# Altium PCB PCB1.PcbDoc (part 1 of 2)
Units mil, origin at the board's own origin, x right, y up, seen from the top; angles counter-clockwise.
Board outline 3287.4 x 2559.05 mil, 2 copper layers (Top Layer, Bottom Layer); 88 components, 66 nets, 297 pads, 96 vias.
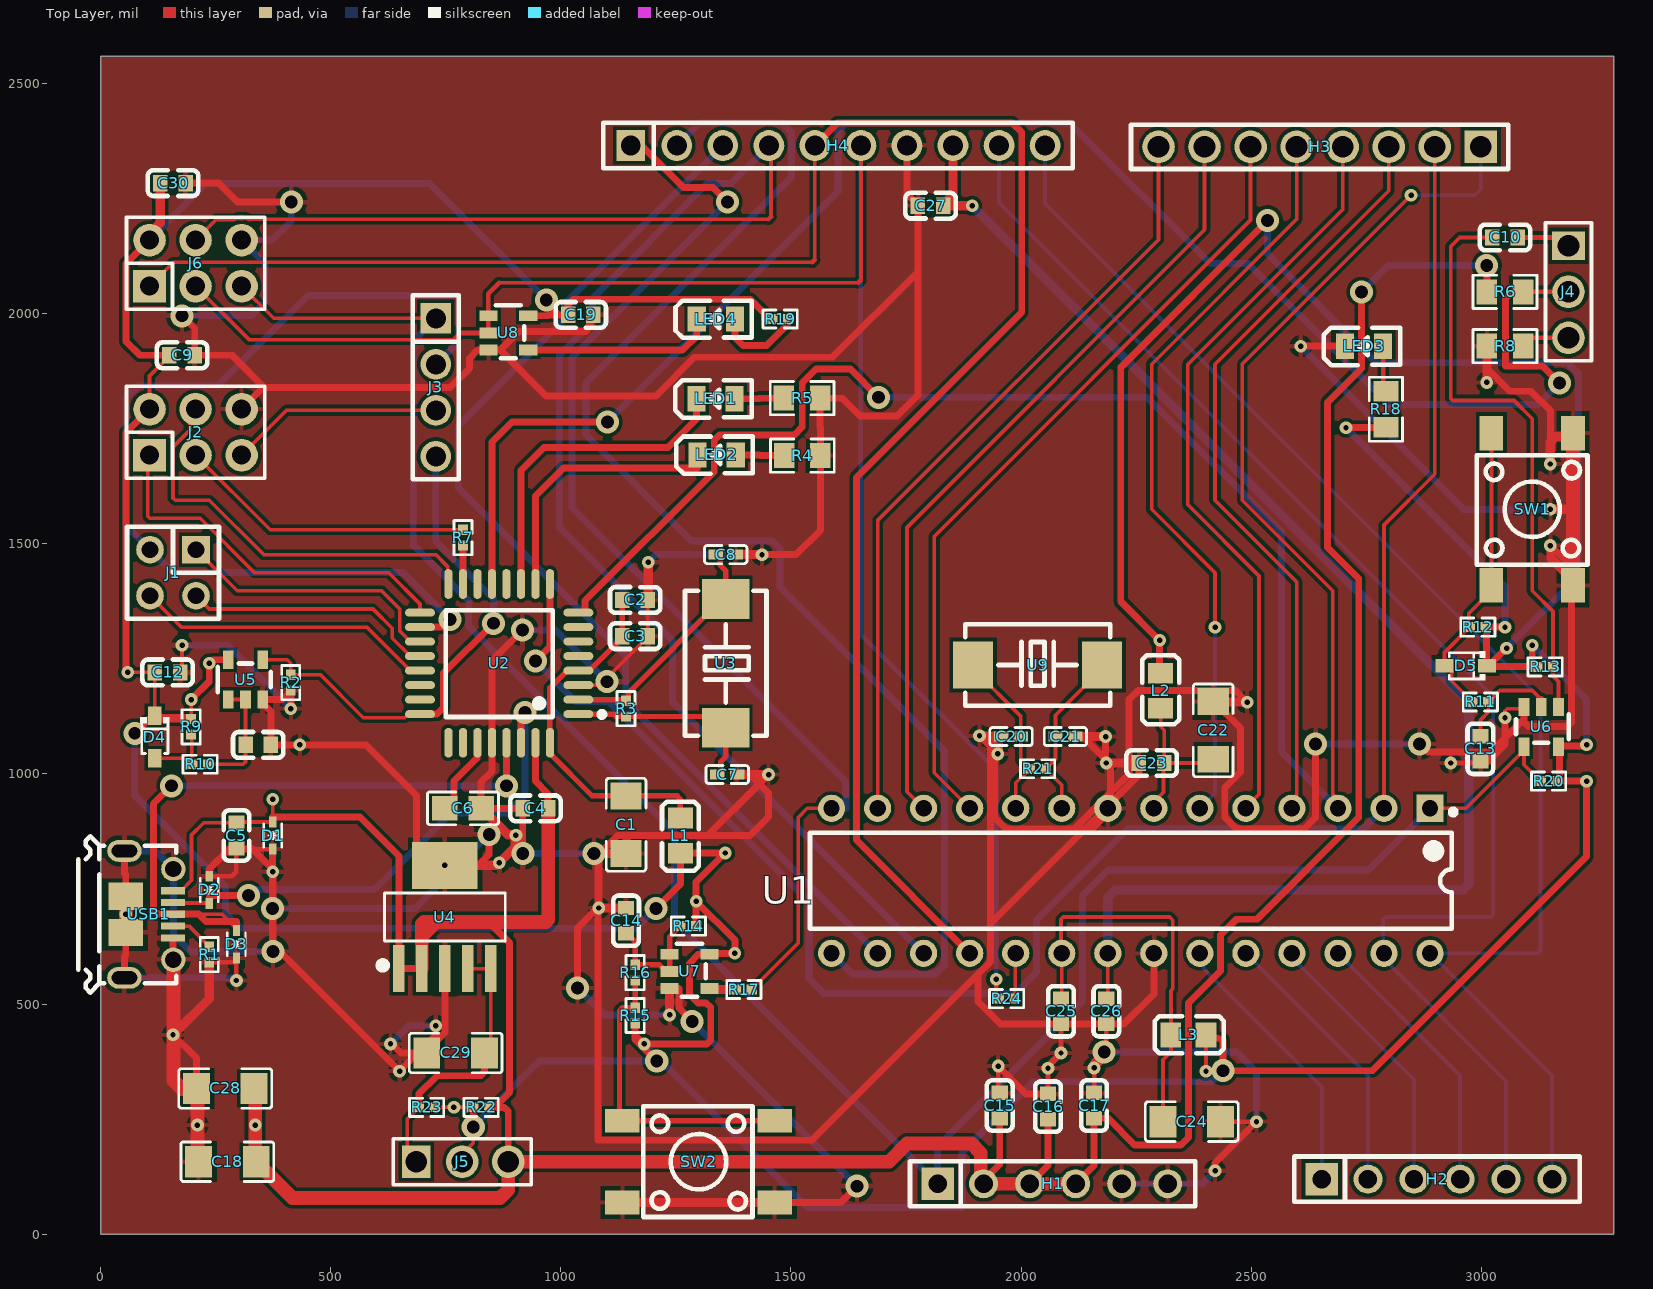
[diagram p0: Top Layer view]
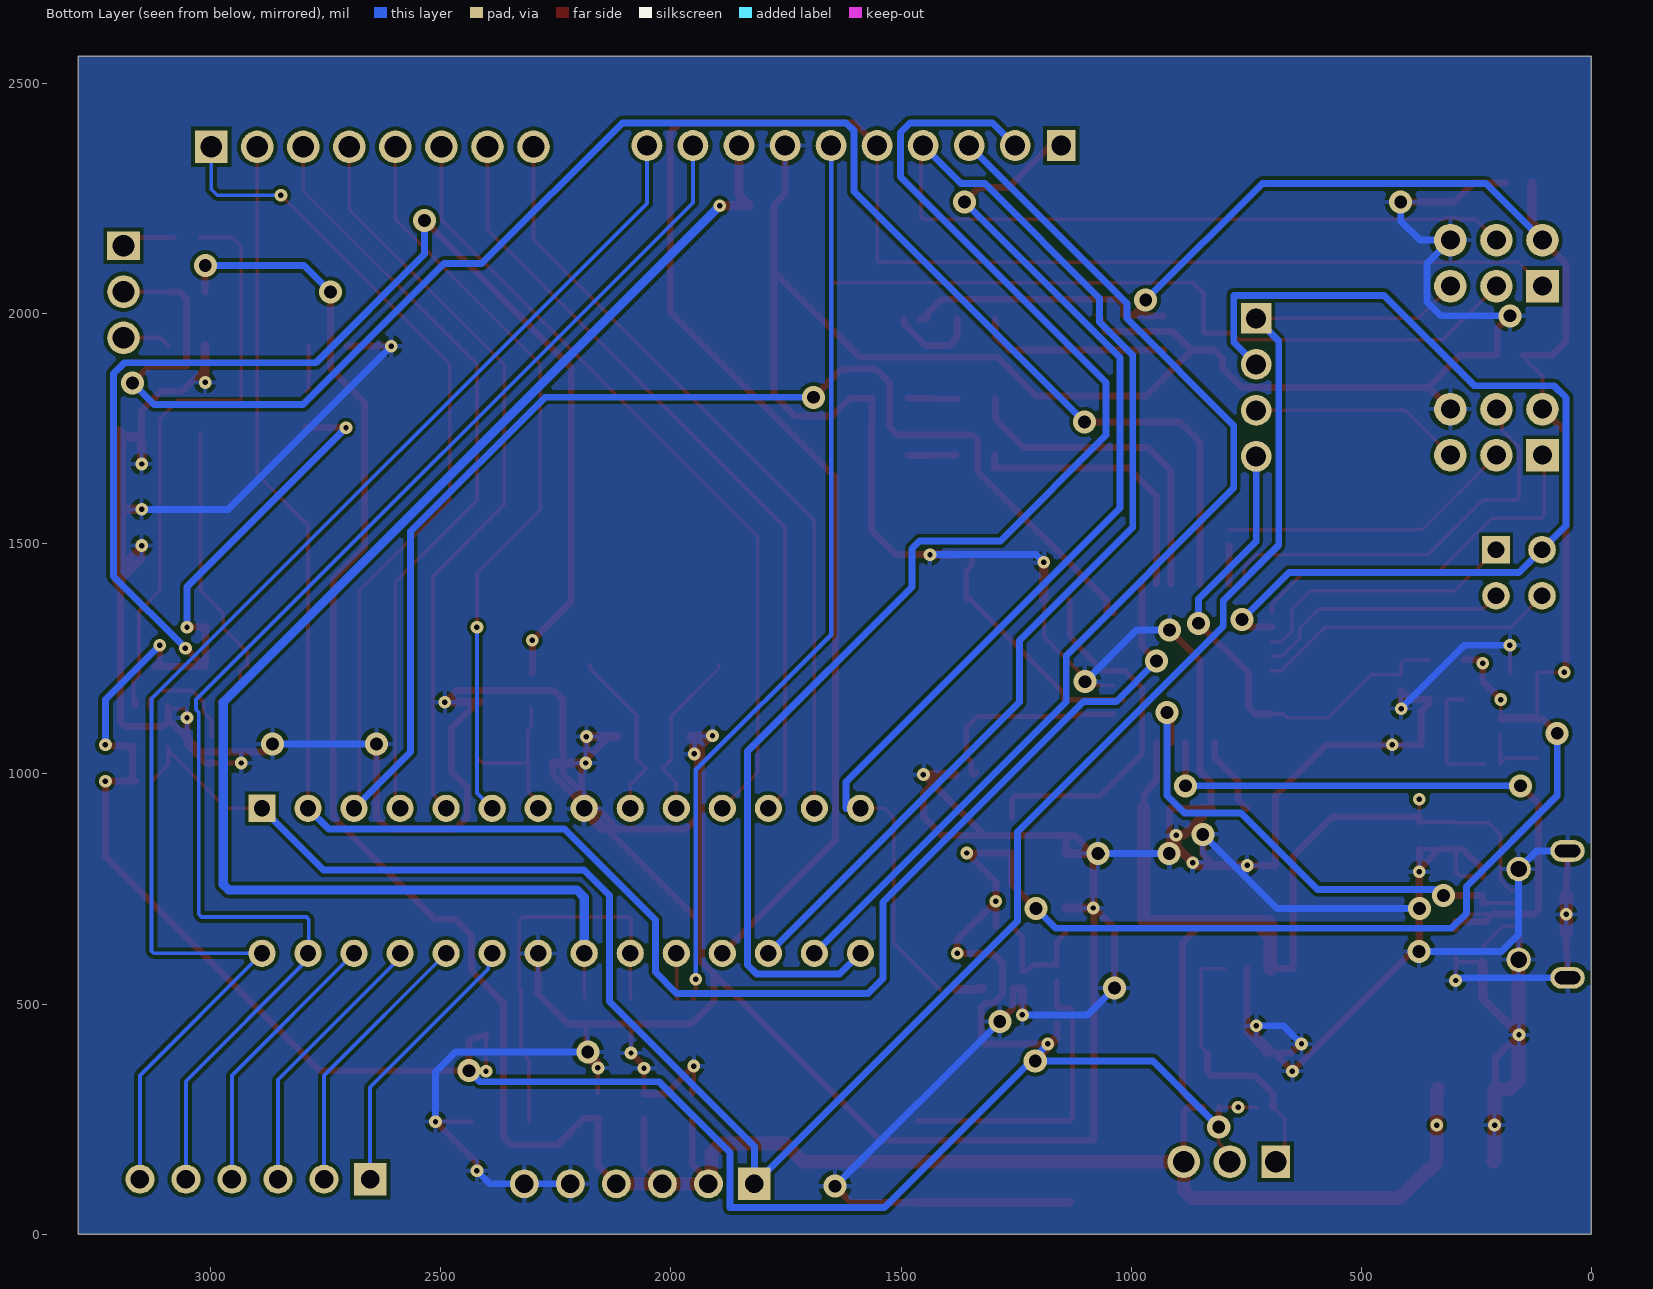
[diagram p1: Bottom Layer view, seen from below]

## Layer stack, top to bottom
Top Solder: solder mask 0.4, Solder Resist, Dk 3.5
Top Layer: signal copper 1.4
Dielectric 1: dielectric 12.6, FR-4, Dk 4.8
Bottom Layer: signal copper 1.4
Bottom Solder: solder mask 0.4, Solder Resist, Dk 3.5

## Board outline
0,0 0,2559.05 3287.4,2559.05 3287.4,0

## Design rules (kind name [scope] priority, off if disabled: settings)
Clearance [All] p1: gap=7.87 ignorepadtopadclearanceinfootprint=FALSE
PolygonConnect [All] p1: connectstyle=Relief reliefconductorwidth=10 reliefentries=4 polygonreliefangle="90 Angle" airgapwidth=10
RoutingVias [All] p1: holewidth=28 width=50 viastyle="Through Hole" minholewidth=10 minwidth=20 maxholewidth=35 maxwidth=60
SolderMaskExpansion [All] p1: expansion=4 istentingtop=FALSE
SupplyNets "Schematic Supply Nets_4" [InNet('GND')] p1: voltage=0.000
SupplyNets "Schematic Supply Nets_3" [InNet('+5V/3V3')] p2: voltage=0.000
SupplyNets "Schematic Supply Nets_2" [InNet('+5V')] p3: voltage=0.000
SupplyNets "Schematic Supply Nets_1" [InNet('+3V3')] p4: voltage=0.000
SupplyNets "Schematic Supply Nets" [InNet('+AREF')] p5: voltage=0.000
Width [All] p1: maxlimit=30 minlimit=8 preferedwidth=15
30 further rules are at their usual default settings.

## Components (designator, comment, footprint, x,y, rotation, side; value= is the part's Value field where it differs from the comment)
C1 "10uF" C1206-10uF 1141.73,889.47 r270 top
C2 "100nF" C0603-100nF 1161.42,1377.95 r180 top
C3 "100nF" C0603-100nF 1161.42,1299.21 r180 top
C4 "100nF" C0603-100nF 944.88,925.2 r180 top
C5 "100nF" C0603-100nF 295.28,866.14 r90 top
C6 "1uF" C0805-1uF 787.4,925.2 r180 top
C7 "18pF" C0402-18pF 1361.46,998.57 r180 top
C8 "18pF" C0402-18pF 1358.27,1476.38 r180 top
C9 "100nF" C0603-100nF 177.17,1909.45 r180 top
C10 "100nF" C0603-100nF 3051.18,2165.35 r0 top
C12 "100nF" C0603-100nF 145.67,1220.47 r180 top
C13 "100nF" C0603-100nF 2997.7,1054.55 r90 top
C14 "100nF" C0603-100nF 1141.73,681.1 r270 top
C15 "100nF" C0603-100nF 1953.43,279.57 r270 top
C16 "100nF" C0603-100nF 2058.43,277.13 r270 top
C17 "100nF" C0603-100nF 2158.43,279.57 r270 top
C18 "10uF" C1206-10uF 275.59,157.48 r0 top
C19 "100nF" C0603-100nF 1043.31,1997.24 r180 top
C20 "18pF" C0402-18pF 1977.97,1081.04 r0 top
C21 "18pF" C0402-18pF 2096.08,1081.04 r180 top
C22 "10uF" C1206-10uF 2417.12,1094.59 r90 top
C23 "100nF" C0603-100nF 2283.46,1023.62 r180 top
C24 "10uF" C1206-10uF 2370.73,244.57 r180 top
C25 "100nF" C0603-100nF 2086.61,484.25 r90 top
C26 "100nF" C0603-100nF 2185.04,484.25 r90 top
C27 "100nF" C0603-100nF 1803.17,2234.4 r0 top
C28 "10uF" C1206-10uF 270.88,316.62 r0 top
C29 "10uF" C1206-10uF 771.36,393.7 r0 top
C30 "100nF" C0603-100nF 157.48,2283.46 r180 top
D1 "LESD5D5.0CT1G" SOD-523_L1.2-W0.8-LS1.6-BI 374.02,866.14 r90 top
D2 "LESD5D5.0CT1G" SOD-523_L1.2-W0.8-LS1.6-BI 236.22,748.03 r270 top
D3 "LESD5D5.0CT1G" SOD-523_L1.2-W0.8-LS1.6-BI 295.28,629.92 r90 top
D4 "BAT54HT1G" DIODE-SOD-323_L1.8-W1.3-LS2.5-RD 118.11,1080.03 r270 top
D5 "BAT54HT1G" DIODE-SOD-323_L1.8-W1.3-LS2.5-RD 2965.69,1234.59 r180 top
H1 "HDR-F-2.54_1x6" HDR-TH_6P-P2.54-V-F 2068.43,109.57 r0 top
H2 "HDR-F-2.54_1x6" HDR-TH_6P-P2.54-V-F 2903.43,119.57 r0 top
H3 "HDR-F-2.54_1x8" HDR-TH_8P-P2.54-V_A2541HWV-8P 2648.43,2362.2 r180 top
H4 "HDR-F-2.54_1x10" HDR-TH_10P-P2.54-V-F 1601.93,2365.14 r0 top
J1 "HDR-M-2.54_2x2" HDR-TH_4P-P2.54-V-M-R2-C2-S2.54-1 157.48,1437.01 r180 top
J2 "HDR-M-2.54_2X3" HDR-TH_6P-P2.54-V-M-R2-C3-S2.54-1 206.48,1742.31 r0 top
J3 "HDR-M-2.54_1x4" HDR-TH_4P-P2.54-V-M 728.35,1839.76 r270 top
J4 "HDR-M-2.54_1x3" HDR-TH_3P-P2.54-V-M-1 3188.98,2047.24 r270 top
J5 "HDR-M-2.54_1x3" HDR-TH_3P-P2.54-V-M-1 785.83,157.48 r0 top
J6 "HDR-M-2.54_2X3" HDR-TH_6P-P2.54-V-M-R2-C3-S2.54-1 206.48,2109.53 r0 top
L1 "600Ω" L0805-600ohm 1259.84,866.14 r90 top
L2 "600Ω" L0805-600ohm 2303.15,1181.1 r270 top
L3 "600Ω" L0805-600ohm 2363.53,433.07 r180 top
LED1 "KT-0805G" LED0805-R-RD 1336.1,1814.97 r0 top
LED2 "KT-0805G" LED0805-R-RD 1338.58,1692.91 r0 top
LED3 "KT-0805G" LED0805-R-RD 2745.14,1929.13 r0 top
LED4 "KT-0805G" LED0805-R-RD 1336.6,1988.19 r0 top
R1 "0Ω" "R0402-0 ohm" 236.22,607.59 r270 top
R2 "10kΩ" R0402-10Kohm 413.39,1198.14 r90 top
R3 "1MΩ" "R0402-1M ohm" 1141.73,1141.73 r270 top
R4 "1kΩ" R0805-1kohm 1524.62,1691.41 r0 top
R5 "1kΩ" R0805-1kohm 1524.04,1816.15 r0 top
R6 "100kΩ" R0805-100kohm 3051.18,2047.24 r0 top
R7 "22Ω" "R0402-22 OHM" 787.4,1513.1 r270 top
R8 "1kΩ" R0805-1kohm 3051.18,1929.13 r0 top
R9 "10kΩ" R0402-10Kohm 196.85,1102.36 r270 top
R10 "22Ω" "R0402-22 OHM" 216.54,1020.98 r0 top
R11 "22Ω" "R0402-22 OHM" 2997.7,1156.36 r0 top
R12 "10kΩ" R0402-10Kohm 2992.13,1318.9 r0 top
R13 "10kΩ" R0402-10Kohm 3138.24,1232.45 r180 top
R14 "10kΩ" R0402-10Kohm 1276.88,669.29 r0 top
R15 "10kΩ" R0402-10Kohm 1161.42,475.09 r90 top
R16 "22Ω" "R0402-22 OHM" 1161.42,568.22 r90 top
R17 "560Ω" "R0402-560 OHM" 1397.64,531.5 r0 top
R18 "1kΩ" R0805-1kohm 2792.49,1792.2 r270 top
R19 "560Ω" "R0402-560 OHM" 1476.38,1988.19 r180 top
R20 "10kΩ" R0402-10Kohm 3145.69,984.26 r0 top
R21 "1MΩ" "R0402-1M ohm" 2035.73,1011.2 r0 top
R22 "0Ω" "R0402-0 ohm" 826.77,275.59 r180 top
R23 "0Ω" "R0402-0 ohm" 708.66,275.59 r180 top
R24 "22Ω" "R0402-22 OHM" 1968.5,511.81 r180 top
SW1 "PTS645SH50SMTR92LFS" KEY-SMD_4P-L6.0-W6.0-P4.50-LS9.0 3110.24,1574.8 r90 top
SW2 "PTS645SH50SMTR92LFS" KEY-SMD_4P-L6.0-W6.0-P4.50-LS9.0 1299.21,157.48 r0 top
U1 "ATMEGA328P-PU" DIP-28_L34.6-W7.3-P2.54-LS10.2-BL 2238.19,767.72 r180 top
U2 "ATMEGA16U2-AU" TQFP-32_L7.0-W7.0-P0.80-LS9.0-TL 866.14,1240.16 r180 top
U3 "ABM2-16.000MHZ-D4Y-T" CRYSTAL-SMD_L8.0-W4.5 1358.27,1240.16 r270 top value=16MHz
U4 "TL1963A-33DCQR" SOT-223-6_L6.5-W3.5-P1.27-LS7.0-BR 748.03,688.98 r270 top
U5 "SN74AHC1G09DBVR" SOT-23-5_L2.9-W1.6-P0.95-LS2.8-BL 314.96,1204.73 r0 top
U6 "SN74AHC1G09DBVR" SOT-23-5_L2.9-W1.6-P0.95-LS2.8-BL 3129.92,1102.36 r180 top
U7 "SN74AHC1G09DBVR" SOT-23-5_L2.9-W1.6-P0.95-LS2.8-BL 1279.53,570.87 r270 top
U8 "SN74AHC1G09DBVR" SOT-23-5_L2.9-W1.6-P0.95-LS2.8-BL 885.83,1957.87 r270 top
U9 "ABM2-16.000MHZ-D4Y-T" CRYSTAL-SMD_L8.0-W4.5 2035.73,1236.45 r0 top value=16MHz
USB1 "105017-0001" MICRO-USB-SMD_105017-0001 105.12,694.89 r270 top
? "100nF" C0603-100nF 342.52,1062.99 r180 top

## Footprints (in the part's own frame and the unit in brackets; to place one, negate y for a bottom-side part, rotate by r counter-clockwise, add the part's x,y. Pads: shape width x height; smd on the part's side, far side on the other; paste and mask are expansions set on the pad)
C0402-18pF [mm]
  rect 0.79x0.54 smd paste-100 mask+0.051: 1(-0.545,0) 2(0.545,0)
  silkscreen extent -1.17,-0.5 1.17,0.5
C0603-100nF [mm]
  rect 0.8x0.9 smd: 1(-0.7,0) 2(0.7,0)
  silkscreen extent -1.39,-0.71 1.39,0.71
C0805-1uF [mm]
  rect 1.41x1.35 smd paste-100 mask+0.051: 1(-1,0) 2(1,0)
  silkscreen extent -1.96,-0.9 1.96,0.9
C1206-10uF [mm]
  rect 1.485x1.728 smd paste-100 mask+0.051: 1(-1.593,0) 2(1.593,0)
  silkscreen extent -2.56,-1.09 2.56,1.09
CRYSTAL-SMD_L8.0-W4.5 [mm]
  rect 2.2x2.6 smd paste+0 mask+0.05: 1(-3.556,0) 2(3.556,0)
  silkscreen extent -4,-2.25 4,2.25
DIODE-SOD-323_L1.8-W1.3-LS2.5-RD [mm]
  rect 1x0.75 smd: 1(-1.173,0) 2(1.173,0)
  silkscreen extent -1.08,-0.8 0.9,0.8
DIP-28_L34.6-W7.3-P2.54-LS10.2-BL [mm]
  rect 1.5x1.5 hole 0.9: 1(-16.51,-4)
  round 1.5 hole 0.9: 2(-13.97,-4) 3(-11.43,-4) 4(-8.89,-4) 5(-6.35,-4) 6(-3.81,-4) 7(-1.27,-4) 8(1.27,-4) 9(3.81,-4) 10(6.35,-4) 11(8.89,-4) 12(11.43,-4) 13(13.97,-4) 14(16.51,-4) 15(16.51,4) 16(13.97,4) 17(11.43,4) 18(8.89,4) 19(6.35,4) 20(3.81,4) 21(1.27,4) 22(-1.27,4) 23(-3.81,4) 24(-6.35,4) 25(-8.89,4) 26(-11.43,4) 27(-13.97,4) 28(-16.51,4)
  silkscreen extent -17.94,-3.95 17.7,2.65
HDR-TH_3P-P2.54-V-M-1 [mm]
  rect 1.575x1.8 hole 1.2: 1(-2.54,0)
  round 1.8 hole 1.2: 2(0,0) 3(2.54,0)
  silkscreen extent -3.81,-1.27 3.81,1.27
HDR-TH_4P-P2.54-V-M [mm]
  rect 1.7x1.7 hole 1.1: 1(-3.81,0)
  round 1.7 hole 1.1: 2(-1.27,0) 3(1.27,0) 4(3.81,0)
  silkscreen extent -5.08,-1.27 5.08,1.27
HDR-TH_4P-P2.54-V-M-R2-C2-S2.54-1 [mil]
  rect 60x60 hole 36: 1(-50,-50)
  round 60 hole 36: 2(-50,50) 3(50,-50) 4(50,50)
  silkscreen extent -100,-100 100,100
HDR-TH_6P-P2.54-V-F [mm]
  rect 1.8x1.8 hole 1.02: 1(-6.35,0)
  round 1.6 hole 1.02: 2(-3.81,0) 3(-1.27,0) 4(1.27,0) 5(3.81,0) 6(6.35,0)
  silkscreen extent -7.87,-1.25 7.87,1.25
HDR-TH_6P-P2.54-V-M-R2-C3-S2.54-1 [mm]
  rect 1.8x1.8 hole 1.05: 1(-2.54,-1.27)
  round 1.8 hole 1.05: 2(-2.54,1.27) 3(0,-1.27) 4(0,1.27) 5(2.54,-1.27) 6(2.54,1.27)
  silkscreen extent -3.81,-2.54 3.81,2.54
HDR-TH_8P-P2.54-V_A2541HWV-8P [mm]
  rect 1.8x1.8 hole 1.2: 1(-8.89,0)
  round 1.8 hole 1.2: 2(-6.35,0) 3(-3.81,0) 4(-1.27,0) 5(1.27,0) 6(3.81,0) 7(6.35,0) 8(8.89,0)
  silkscreen extent -10.41,-1.22 10.41,1.22
HDR-TH_10P-P2.54-V-F [mm]
  rect 1.575x1.7 hole 1.1: 1(-11.43,0)
  round 1.7 hole 1.1: 2(-8.89,0) 3(-6.35,0) 4(-3.81,0) 5(-1.27,0) 6(1.27,0) 7(3.81,0) 8(6.35,0) 9(8.89,0) 10(11.43,0)
  silkscreen extent -12.95,-1.25 12.95,1.25
KEY-SMD_4P-L6.0-W6.0-P4.50-LS9.0 [mm]
  rect 1.9x1.3 smd: 1(-4.2,2.25) 2(4.2,2.25) 3(-4.2,-2.25) 4(4.2,-2.25)
  silkscreen extent -3.05,-3.05 2.98,3.05
L0805-600ohm [mil]
  rect 44.59x54.21 smd paste-3937.01 mask+2: 1(-38.04,0) 2(38.04,0)
  silkscreen extent -77,-40 73,40
LED0805-R-RD [mm]
  rect 1x1.4 smd: 1(1.05,0) 2(-1.05,0)
  silkscreen extent -2.22,-1.04 1.99,1.01, body extent -0.8,-0.25 0.8,0.35, height 1.15
MICRO-USB-SMD_105017-0001 [mm]
  rect 0.4x1.3 smd paste-100 mask+0.051: 1(-1.3,1.33) 2(-0.65,1.33) 3(0,1.33) 4(0.65,1.33) 5(1.3,1.33)
  round 1.35 hole 0.9: 6(-2.5,1.35) 7(2.5,1.35)
  oval 1.2x1.9 hole 0.7 slot 1.4 at 90 deg: 8(3.5,-1.35) 9(-3.5,-1.35)
  rect 1.5x1.9 smd paste-100 mask+0.051: 10(-1,-1.28) 10(1,-1.28)
  silkscreen extent -4.32,-3.9 4.32,1.5
"R0402-0 ohm" [mm]
  rect 0.566x0.54 smd paste-100 mask+0.051: 1(-0.433,0) 2(0.433,0)
  silkscreen extent -0.94,-0.5 0.94,0.5
"R0402-1M ohm" [mm]
  rect 0.566x0.54 smd paste-100 mask+0.051: 1(-0.433,0) 2(0.433,0)
  silkscreen extent -0.94,-0.5 0.94,0.5
R0402-10Kohm [mm]
  rect 0.566x0.54 smd paste-100 mask+0.051: 1(-0.433,0) 2(0.433,0)
  silkscreen extent -0.94,-0.5 0.94,0.5
"R0402-22 OHM" [mm]
  rect 0.566x0.54 smd paste-100 mask+0.051: 1(-0.433,0) 2(0.433,0)
  silkscreen extent -0.94,-0.5 0.94,0.5
"R0402-560 OHM" [mm]
  rect 0.566x0.54 smd paste-100 mask+0.051: 1(-0.433,0) 2(0.433,0)
  silkscreen extent -0.94,-0.5 0.94,0.5
R0805-1kohm [mm]
  rect 1.133x1.377 smd paste-100 mask+0.051: 1(-1,0) 2(1,0)
  silkscreen extent -1.76,-0.92 1.76,0.92, body extent -0.85,-0.47 0.85,0.47, height 0.56
R0805-100kohm [mil]
  rect 44.59x54.21 smd paste-3937.01 mask+2: 1(-39.37,0) 2(39.37,0)
  silkscreen extent -69,-36 69,36, body extent -21,-13 21,15, height 10
SOD-523_L1.2-W0.8-LS1.6-BI [mm]
  rect 0.6x0.4 smd: 1(-0.75,0) 2(0.75,0)
  silkscreen extent -0.65,-0.5 0.65,0.5
SOT-23-5_L2.9-W1.6-P0.95-LS2.8-BL [mm]
  rect 0.6x1 smd paste+0 mask+0.05: 1(-0.95,-1.1) 2(0,-1.1) 3(0.95,-1.1) 4(0.95,1.1) 5(-0.95,1.1)
  silkscreen extent -1.52,-0.7 1.4,0.89
SOT-223-6_L6.5-W3.5-P1.27-LS7.0-BR [mm]
  rect 2.595x0.644 smd: 1(2.848,-2.54) 2(2.848,-1.27) 3(2.848,0) 4(2.848,1.27) 5(2.848,2.54)
  rect 2.595x3.6 smd: 6(-2.848,0)
  silkscreen extent -1.32,-3.63 2.87,3.33
TQFP-32_L7.0-W7.0-P0.80-LS9.0-TL [mm]
  oval 1.65x0.45 smd: 1(-4.369,2.8) 2(-4.369,2) 3(-4.369,1.2) 4(-4.369,0.4) 5(-4.369,-0.4) 6(-4.369,-1.2) 7(-4.369,-2) 8(-4.369,-2.8) 17(4.369,-2.8) 18(4.369,-2) 19(4.369,-1.2) 20(4.369,-0.4) 21(4.369,0.4) 22(4.369,1.2) 23(4.369,2) 24(4.369,2.8)
  oval 0.45x1.65 smd: 9(-2.8,-4.381) 10(-2,-4.381) 11(-1.2,-4.381) 12(-0.4,-4.381) 13(0.4,-4.381) 14(1.2,-4.381) 15(2,-4.381) 16(2.8,-4.381) 25(2.8,4.382) 26(2,4.382) 27(1.2,4.382) 28(0.4,4.382) 29(-0.4,4.382) 30(-1.2,4.382) 31(-2,4.382) 32(-2.8,4.382)
  silkscreen extent -5.81,-2.94 2.95,2.97, body extent -4.62,-4.62 4.62,4.62, height 1.2

## Part data
C1 C18 C22 C24 C28 C29: library part CL31A106KBHNNNE, "50V 10uF X5R ±10% 1206 Multilayer Ceramic Capacitors MLCC - SMD/SMT ROHS", JLCPCB Part Class="Basic Part", LCSC Part Name="10uF ±10% 50V", Manufacturer=SAMSUNG(三星), Tolerance=±10%, Add into BOM=yes, Convert to PCB=yes, Datasheet=https://atta.szlcsc.com/upload/public/pdf/source/20160218/1457707763339.pdf, Device=CL31A106KBHNNNE, Manufacturer Part=CL31A106KBHNNNE, Supplier=LCSC, Supplier Footprint=1206, Supplier Part=C13585, Symbol=CL31A106KBHNNNE
C2 C3 C4 C5 C9 C10 C12 C13 C14 C15 C16 C17 C19 C23 C25 C26 C27 C30 ?: library part CC0603KRX7R9BB104, "50V 100nF X7R ±10% 0603 Multilayer Ceramic Capacitors MLCC - SMD/SMT ROHS", JLCPCB Part Class="Basic Part", LCSC Part Name="100nF ±10% 50V", Manufacturer=YAGEO(国巨), Tolerance=±10%, Add into BOM=yes, Convert to PCB=yes, Datasheet=https://atta.szlcsc.com/upload/public/pdf/source/20180910/C282072_33301C7F631E79921B82A8DAC6BCC5B3.pdf, Device=CC0603KRX7R9BB104, Manufacturer Part=CC0603KRX7R9BB104, Supplier=LCSC, Supplier Footprint=0603, Supplier Part=C14663, Symbol=CC0603KRX7R9BB104
C6: library part CL21B105KBFNNNE, "50V 1uF X7R ±10% 0805 Multilayer Ceramic Capacitors MLCC - SMD/SMT ROHS", JLCPCB Part Class="Basic Part", LCSC Part Name="1uF ±10% 50V", Manufacturer=SAMSUNG(三星), Tolerance=±10%, Add into BOM=yes, Convert to PCB=yes, Datasheet=https://atta.szlcsc.com/upload/public/pdf/source/20160218/1457707763339.pdf, Device=CL21B105KBFNNNE, Manufacturer Part=CL21B105KBFNNNE, Supplier=LCSC, Supplier Footprint=0805, Supplier Part=C28323, Symbol=CL21B105KBFNNNE
C7 C8 C20 C21: library part CC0402JRNPO9BN180, "50V 18pF NP0 ±5% 0402 Multilayer Ceramic Capacitors MLCC - SMD/SMT ROHS", JLCPCB Part Class="Extended Part", LCSC Part Name="18pF ±5% 50V", Manufacturer=YAGEO(国巨), Tolerance=±5%, Add into BOM=yes, Convert to PCB=yes, Datasheet=https://atta.szlcsc.com/upload/public/pdf/source/20170505/1493957838062.pdf, Device=CC0402JRNPO9BN180, Manufacturer Part=CC0402JRNPO9BN180, Supplier=LCSC, Supplier Footprint=0402, Supplier Part=C106202, Symbol=CC0402JRNPO9BN180
D1 D2 D3: "9.4A 18.6V 5.6V Bidirectional 5V SOD-523 ESD and Surge Protection (TVS/ESD) ROHS", Breakdown Voltage=5.6V, JLCPCB Part Class="Extended Part", LCSC Part Name=双向ESD, Manufacturer=LRC(乐山无线电), Maximum Clamping Voltage=18.6V, Peak Pulse Current (Ipp)=9.4A, Reverse Stand-Off Voltage (Vrwm)=5V, Add into BOM=yes, Convert to PCB=yes, Datasheet=https://atta.szlcsc.com/upload/public/pdf/source/20190807/C383211_633DF4B4E2C161403226E5235FE33A1C.pdf, Device=LESD5D5.0CT1G, Manufacturer Part=LESD5D5.0CT1G, polarity=Bidirectional, Supplier=LCSC, Supplier Footprint=SOD-523, Supplier Part=C383211, Symbol=LESD5D5.0CT1G, Type=ESD
D4 D5: "30V 800mV@100mA 200mA SOD-323 Schottky Diodes ROHS", Forward Voltage (Vf@If)=800mV@100mA, JLCPCB Part Class="Extended Part", LCSC Part Name="电压:30V 电流:200mA", Manufacturer=onsemi(安森美), Rectified Current=200mA, Reverse Leakage Current (Ir)=2uA@25V, Reverse Voltage (Vr)=30V, Add into BOM=yes, Convert to PCB=yes, Datasheet=https://atta.szlcsc.com/upload/public/pdf/source/20131023/1457706657764.pdf, Device=BAT54HT1G, Manufacturer Part=BAT54HT1G, Supplier=LCSC, Supplier Footprint=SOD-323, Supplier Part=C21107, Symbol=BAT54HT1G
H1 H2: "2.54mm Single Row 6P Direct Insert 1x6P Plugin,P=2.54mm Female Headers ROHS", JLCPCB Part Class="Extended Part", LCSC Part Name="间距:2.54mm 1x6P 直插", Manufacturer=BOOMELE(博穆精密), Manufacturer Part=2.54-1*6P母, Add into BOM=yes, Contact Material=-, Contact Plating=-, Convert to PCB=yes, Datasheet=https://atta.szlcsc.com/upload/public/pdf/source/20210301/C2718488_F4427B881E42CAA8DDB0B1C12B3A522C.pdf, Device=2.54-1*6P母, Holes Structure=1x6P, Insulation Height=-, Mounting Type=Straight, Number of Holes=6P, Number of Rows=Plugin, Pitch=2.54mm, Row Spacing=-, Supplier=LCSC, Supplier Footprint=插件,P=2.54mm, Supplier Part=C40877, Symbol=Header-Female-2.54_1x6
H3: library part A2541HWV-8P, "2.54mm 3A Single Row Gold -40℃~+105℃ 250V 8P Brass Direct Insert 1x8P Top 8.5mm Square Hole Plugin,P=2.54mm Female Headers ROHS", Current Rating=3A, JLCPCB Part Class="Extended Part", LCSC Part Name="1x8P 间距:2.54mm 直插", Manufacturer=CJT(长江连接器), Operating Temperature=-40℃~+105℃, Voltage Rating (Max)=250V, Add into BOM=yes, Circular Hole / Square Hole="Square Hole", Contact Material=Brass, Contact Plating=Gold, Convert to PCB=yes, Datasheet=https://atta.szlcsc.com/upload/public/pdf/source/20180724/C239359_48B1BC0CA1B4E4396A63955AAFD15564.pdf, Device=A2541HWV-8P, Holes Direction=Top, Holes Structure=1x8P, Insulation Height=8.5mm, Manufacturer Part=A2541HWV-8P, Mounting Type="Direct Insert", Number of Positions=8P, Number of Rows="Single Row", PIN Length=3.2mm, Pitch=2.54mm, Row Spacing=-, Supplier=LCSC, Supplier Footprint=插件,P=2.54mm, Supplier Part=C225505, Symbol=A2541HWV-8P
H4: library part 2.54-1*10P母, "2.54mm Single Row 10P Direct Insert 1x10P Plugin,P=2.54mm Female Headers ROHS", JLCPCB Part Class="Extended Part", LCSC Part Name="间距:2.54mm 1x10P 直插", Manufacturer=BOOMELE(博穆精密), Add into BOM=yes, Contact Material=-, Contact Plating=-, Convert to PCB=yes, Datasheet=https://atta.szlcsc.com/upload/public/pdf/source/20200813/C35445_A4147CED0A1C9075722E373C7771E928.pdf, Device=2.54-1*10P母, Holes Structure=1x10P, Insulation Height=-, Manufacturer Part=2.54-1*10P母, Mounting Type=Straight, Number of Holes=10P, Number of Rows=Plugin, Pitch=2.54mm, Row Spacing=-, Supplier=LCSC, Supplier Footprint=插件,P=2.54mm, Supplier Part=C35445, Symbol=Header-Female-2.54_1x10
J1: library part 2.54-2*2P针, "Straight 4P 2.54mm Double Row Black 2.54mm Plugin,P=2.54mm Pin Headers ROHS", Color=Black, Current Rating=-, JLCPCB Part Class="Extended Part", LCSC Part Name="间距:2.54mm 直插", Manufacturer=BOOMELE(博穆精密), Add into BOM=yes, Circluar Pins/Square Pins=-, Contact Material=-, Contact Plating=-, Convert to PCB=yes, Datasheet=https://atta.szlcsc.com/upload/public/pdf/source/20221201/C605E3BE9C0F7226363017EFD1BDE852.pdf, Device=2.54-2*2P针, Insulation Height=-, Length of Mating Pin=-, Manufacturer Part=2.54-2*2P针, Mounting Type=Straight, Number of Pins=4P, Number of Rows="Double Row", Pin Structure=-, Pitch=2.54mm, Row Spacing=2.54mm, Supplier=LCSC, Supplier Footprint=插件,P=2.54mm, Supplier Part=C66690, Symbol=Header-Male-2.54_2x2, Voltage Rating (Max)=-
J2 J6: library part 2.54-2*3P针, "Straight 6P 2.54mm Double Row Black Plugin,P=2.54mm Pin Headers ROHS", Color=Black, Current Rating=-, JLCPCB Part Class="Extended Part", LCSC Part Name="间距:2.54mm 直插", Manufacturer=BOOMELE(博穆精密), Add into BOM=yes, Circluar Pins/Square Pins=-, Contact Material=-, Contact Plating=-, Convert to PCB=yes, Device=2.54-2*3P针, Insulation Height=-, Length of Mating Pin=-, Manufacturer Part=2.54-2*3P针, Mounting Type=Straight, Number of Pins=6P, Number of Rows="Double Row", Pin Structure=-, Pitch=2.54mm, Row Spacing=-, Supplier=LCSC, Supplier Footprint=插件,P=2.54mm, Supplier Part=C65114, Symbol=Header-Male-2.54_2x3, Voltage Rating (Max)=-
J3: "Straight 2.54mm 4P 6mm -40℃~+105℃ 3mm 2.54mm Single Row Black Brass 1x4P Plugin,P=2.54mm Pin Headers ROHS", Color=Black, Current Rating=-, JLCPCB Part Class="Extended Part", LCSC Part Name="1x4P 间距:2.54mm 直插", Manufacturer=Ckmtw(灿科盟), Manufacturer Part=B-2100S04P-A110, Operating Temperature=-40℃~+105℃, Add into BOM=yes, Circluar Pins/Square Pins=-, Contact Material=Brass, Contact Plating=-, Convert to PCB=yes, Datasheet=https://atta.szlcsc.com/upload/public/pdf/source/20170821/C124381_1503303309126901535.pdf, Device=B-2100S04P-A110, Insulation Height=2.54mm, Length of End Connection Pin=3mm, Length of Mating Pin=6mm, Mounting Type=Straight, Number of Pins=4P, Number of Rows="Single Row", Pin Structure=1x4P, Pitch=2.54mm, Row Spacing=-, Supplier=LCSC, Supplier Footprint=插件,P=2.54mm, Supplier Part=C124378, Symbol=Header-Male-2.54_1x4, Voltage Rating (Max)=-
J4 J5: "Tin 3A Straight Policy 2.54mm 3P -65℃~+125℃ 2.54mm Single Row Black Phosphor Bronze Plugin,P=2.54mm Pin Headers ROHS", Color=Black, Current Rating=3A, JLCPCB Part Class="Extended Part", LCSC Part Name="间距:2.54mm 方针 直插", Manufacturer=Amphenol, Manufacturer Part=77311-102-03LF, Operating Temperature=-65℃~+125℃, Voltage Rating (Max)=-, Add into BOM=yes, Circluar Pins/Square Pins=Policy, Contact Material="Phosphor Bronze", Contact Plating=Tin, Convert to PCB=yes, Datasheet=https://atta.szlcsc.com/upload/public/pdf/source/20180628/C213450_5021AFFAB06BCF705334CA5527F304F1.pdf, Device=77311-102-03LF, Insulation Height=2.54mm, Length of Mating Pin=-, Mounting Type=Straight, Number of Pins=3P, Number of Rows="Single Row", Pin Structure=-, Pitch=2.54mm, Row Spacing=-, Supplier=LCSC, Supplier Footprint=插件,P=2.54mm, Supplier Part=C180248, Symbol=77311-102-03LF
L1 L2 L3: library part MPZ2012S601AT000, "100mΩ ±25% 600Ω@100MHz 0805 Ferrite Beads ROHS", Current Rating=2A, DC Resistance=100mΩ, Impedance @ Frequency=600Ω@100MHz, JLCPCB Part Class="Extended Part", LCSC Part Name="单路 0805磁珠 阻抗600Ω@100MHz", Manufacturer=TDK, Tolerance=±25%, Add into BOM=yes, Circuits=1, Convert to PCB=yes, Datasheet=https://atta.szlcsc.com/upload/public/pdf/source/20141219/1457707252380.pdf, Device=MPZ2012S601AT000, Manufacturer Part=MPZ2012S601AT000, Supplier=LCSC, Supplier Footprint=0805, Supplier Part=C21519, Symbol=MPZ2012S601AT000
LED1 LED2 LED3 LED4: "Emerald 0805 LED Indication - Discrete ROHS", Color Temperature=-, Emitted Color=Emerald, JLCPCB Part Class="Basic Part", LCSC Part Name="0805 翠绿 高亮", Manufacturer=KENTO, Add into BOM=yes, Convert to PCB=yes, Datasheet=https://atta.szlcsc.com/upload/public/pdf/source/20170209/1486607340485.pdf, Device=KT-0805G, Diode Configuration=-, Dominant Wavelength=-, Forward Current=-, Forward Voltage (VF)=-, Lamp Holder Type=-, Lens Color=-, Luminous Intensity=-, Manufacturer Part=KT-0805G, Mounting Sytle=-, Operating Temperature=-, Peak Wavelength=-, Power Dissipation=-, Supplier=LCSC, Supplier Footprint=0805, Supplier Part=C2297, Symbol="0805G (Green)", Viewing Angle=-
R1 R22 R23: library part RC0402FR-070RL, "62.5mW Thick Film Resistors 50V ±1% 0Ω 0402 Chip Resistor - Surface Mount ROHS", JLCPCB Part Class="Extended Part", LCSC Part Name="厚膜电阻 0Ω ±1% 62.5mW", Manufacturer=YAGEO(国巨), Operating Temperature Range=-55℃~+155℃, Temperature Coefficient=-, Tolerance=±1%, Add into BOM=yes, Convert to PCB=yes, Datasheet=https://atta.szlcsc.com/upload/public/pdf/source/20180927/C295883_E8D83085EA81BD7DE0B2B681138C15EE.pdf, Device=RC0402FR-070RL, Manufacturer Part=RC0402FR-070RL, Supplier=LCSC, Supplier Footprint=0402, Supplier Part=C106231, Symbol=RC0402FR-070RL, Type="Thick Film Resistors"
R2 R9 R12 R13 R14 R15 R20: library part RC0402FR-0710KL, "62.5mW Thick Film Resistors 50V ±100ppm/℃ ±1% 10kΩ 0402 Chip Resistor - Surface Mount ROHS", JLCPCB Part Class="Extended Part", LCSC Part Name="厚膜电阻 10kΩ ±1% 62.5mW", Manufacturer=YAGEO(国巨), Operating Temperature Range=-55℃~+155℃, Temperature Coefficient=±100ppm/℃, Tolerance=±1%, Add into BOM=yes, Convert to PCB=yes, Datasheet=https://atta.szlcsc.com/upload/public/pdf/source/20170925/C131467_1506321478108990263.pdf, Device=RC0402FR-0710KL, Manufacturer Part=RC0402FR-0710KL, Supplier=LCSC, Supplier Footprint=0402, Supplier Part=C60490, Symbol=RC0402FR-0710KL, Type="Thick Film Resistors"
R3 R21: library part RC0402FR-071ML, "62.5mW Thick Film Resistors 50V ±100ppm/℃ ±1% 1MΩ 0402 Chip Resistor - Surface Mount ROHS", JLCPCB Part Class="Extended Part", LCSC Part Name="厚膜电阻 1MΩ ±1% 62.5mW", Manufacturer=YAGEO(国巨), Operating Temperature Range=-55℃~+155℃, Temperature Coefficient=±100ppm/℃, Tolerance=±1%, Add into BOM=yes, Convert to PCB=yes, Datasheet=https://atta.szlcsc.com/upload/public/pdf/source/20181009/C309620_DA5935B6E1D48212CB7A533FE518B3C2.pdf, Device=RC0402FR-071ML, Manufacturer Part=RC0402FR-071ML, Supplier=LCSC, Supplier Footprint=0402, Supplier Part=C138033, Symbol=RC0402FR-071ML, Type="Thick Film Resistors"
R4 R5 R8 R18: library part "FRC0805J102 TS", "0.125W Thick Film Resistors 150V ±100ppm/℃ ±5% 1kΩ 0805 Chip Resistor - Surface Mount ROHS", JLCPCB Part Class="Extended Part", LCSC Part Name="1kΩ ±5% 125mW 厚膜电阻", Manufacturer=FOJAN(富捷), Operating Temperature Range=-55℃~+155℃, Temperature Coefficient=±100ppm/℃, Tolerance=±5%, Add into BOM=yes, Convert to PCB=yes, Datasheet=https://atta.szlcsc.com/upload/public/pdf/source/20211221/925EC7D7225764EE0046F22065062C87.pdf, Device="FRC0805J102 TS", Manufacturer Part="FRC0805J102 TS", Supplier=LCSC, Supplier Footprint=0805, Supplier Part=C2907295, Symbol="FRC0805J102 TS", Type="Thick Film Resistors"
R6: library part 0805W8F1003T5E_1, "0.125W Thick Film Resistors 150V ±100ppm/℃ ±1% 100kΩ 0805 Chip Resistor - Surface Mount ROHS", JLCPCB Part Class="Basic Part", LCSC Part Name="100kΩ ±1% 125mW 厚膜电阻", Manufacturer=UNI-ROYAL(厚声), Manufacturer Part=0805W8F1003T5E, Operating Temperature Range=-55℃~+155℃, Temperature Coefficient=±100ppm/℃, Tolerance=±1%, Add into BOM=yes, Convert to PCB=yes, Datasheet=https://atta.szlcsc.com/upload/public/pdf/source/20200306/C422600_1E6D84923E4A46A82E41ADD87F860B5C.pdf, Device=0805W8F1003T5E, Supplier=LCSC, Supplier Footprint=0805, Supplier Part=C149504, Symbol=0805W8F1003T5E_C149504, Type="Thick Film Resistors"
R7 R10 R11 R16 R24: library part RC0402FR-0722RL, "62.5mW Thick Film Resistors 50V ±100ppm/℃ ±1% 22Ω 0402 Chip Resistor - Surface Mount ROHS", JLCPCB Part Class="Extended Part", LCSC Part Name="厚膜电阻 22Ω ±1% 62.5mW", Manufacturer=YAGEO(国巨), Operating Temperature Range=-55℃~+155℃, Temperature Coefficient=±100ppm/℃, Tolerance=±1%, Add into BOM=yes, Convert to PCB=yes, Datasheet=https://atta.szlcsc.com/upload/public/pdf/source/20180821/C275644_0D56F95EFF785E7D9A1FEF436B37DA78.pdf, Device=RC0402FR-0722RL, Manufacturer Part=RC0402FR-0722RL, Supplier=LCSC, Supplier Footprint=0402, Supplier Part=C114765, Symbol=RC0402FR-0722RL, Type="Thick Film Resistors"
R17 R19: library part RC0402FR-07560RL, "62.5mW Thick Film Resistors 50V ±100ppm/℃ ±1% 560Ω 0402 Chip Resistor - Surface Mount ROHS", JLCPCB Part Class="Extended Part", LCSC Part Name="厚膜电阻 560Ω ±1% 62.5mW", Manufacturer=YAGEO(国巨), Operating Temperature Range=-55℃~+155℃, Temperature Coefficient=±100ppm/℃, Tolerance=±1%, Add into BOM=yes, Convert to PCB=yes, Datasheet=https://atta.szlcsc.com/upload/public/pdf/source/20181009/C309620_DA5935B6E1D48212CB7A533FE518B3C2.pdf, Device=RC0402FR-07560RL, Manufacturer Part=RC0402FR-07560RL, Supplier=LCSC, Supplier Footprint=0402, Supplier Part=C163460, Symbol=RC0402FR-07560RL, Type="Thick Film Resistors"
SW1 SW2: "6mm 5mm Round Button 50mA Standing paste 6mm SPST 200gf 12V SMD,6x6mm Tactile Switches ROHS", Contact Current=50mA, JLCPCB Part Class="Extended Part", LCSC Part Name="6*6*5mm 立贴 轻触开关", Manufacturer=C&K, Operating Force=200gf, Operating Temperature=-40℃~+85℃, Voltage Rating (DC)=12V, Actuator Style="Round Button", Add into BOM=yes, Circuit=SPST, Convert to PCB=yes, Datasheet=https://atta.szlcsc.com/upload/public/pdf/source/20190108/C285530_E89B379DE8DD14E424006A6061D0203A.pdf, Device=PTS645SH50SMTR92LFS, Manufacturer Part=PTS645SH50SMTR92LFS, Mechanical Life=-, Mounting Style="Standing paste", Pin Style=Gullwing, Supplier=LCSC, Supplier Footprint=SMD,6x6mm, Supplier Part=C221869, Switch Height=5mm, Switch Length=6mm, Switch Width=6mm, Symbol=PTS645SH50SMTR92LFS, With Lamp=-
U1: "AVR 20MHz DIP-28-300mil Microcontrollers (MCU/MPU/SOC) ROHS", JLCPCB Part Class="Extended Part", LCSC Part Name="基于AVR增强型RISC架构的低功耗CMOS 8位微控制器 MSL=1", Low-Voltage Detect=有, Manufacturer=MICROCHIP(美国微芯), Operating Temperature Range=-40℃~+85℃, Operating Voltage Range=1.8V~5.5V, ADC (Bit)=10bit, Add into BOM=yes, CCP Capture/Compare=-, communication protocol=-, Convert to PCB=yes, CPU Core=AVR, CPU Maximum Speed=20MHz, DAC (Bit)=-, Datasheet=https://atta.szlcsc.com/upload/public/pdf/source/20150124/1457707257819.pdf, Device=ATMEGA328P-PU, Direct Memory Access=-, EEPROM=1KB, GPIO Ports Number=23, Infrared Data Association=-, Internal Comparator=-, Internal Oscillator=有, Manufacturer Part=ATMEGA328P-PU, Peripheral/Function=WDT；PWM, Program Memory Type=FLASH, Program Storage Size=32KB, PWM (Bit)=-, RAM Size=2KB, Real-Time Clock=-, Secure Digital Input and Output=-, Supplier=LCSC, Supplier Footprint=DIP-28-300mil, Supplier Part=C33901, Symbol=ATMEGA328P-PU, Universal Serial Bus=-, Watchdog=有
U2: "AVR 16MHz TQFP-32(7x7) Microcontrollers (MCU/MPU/SOC) ROHS", JLCPCB Part Class="Extended Part", Low-Voltage Detect=有, Manufacturer=MICROCHIP(美国微芯), Operating Temperature Range=-40℃~+85℃, Operating Voltage Range=2.7V~5.5V, ADC (Bit)=-, Add into BOM=yes, CCP Capture/Compare=-, communication protocol=-, Convert to PCB=yes, CPU Core=AVR, CPU Maximum Speed=16MHz, DAC (Bit)=-, Datasheet=https://atta.szlcsc.com/upload/public/pdf/source/20150921/1457707392275.pdf, Device=ATMEGA16U2-AU, Direct Memory Access=-, EEPROM=512Byte, GPIO Ports Number=22, Infrared Data Association=-, Internal Comparator=-, Internal Oscillator=有, LCSC Part Name=ATMEGA16U2-AU, Manufacturer Part=ATMEGA16U2-AU, Peripheral/Function=WDT；PWM, Program Memory Type=FLASH, Program Storage Size=16KB, PWM (Bit)=-, RAM Size=512Byte, Real-Time Clock=-, Secure Digital Input and Output=-, Supplier=LCSC, Supplier Footprint=TQFP-32(7x7), Supplier Part=C59019, Symbol=ATMEGA16U2-AU, Universal Serial Bus=有, Watchdog=有
U3 U9: "16MHz 18pF ±30ppm ±30ppm SMD8045-2P Crystals ROHS", Equivalent Series Resistance (ESR)=50Ω, Frequency Stability=±30ppm, JLCPCB Part Class="Extended Part", LCSC Part Name="16MHz ±30ppm 18pF", Manufacturer=ABRACON, Add into BOM=yes, Convert to PCB=yes, Crystal Type=-, Datasheet=https://atta.szlcsc.com/upload/public/pdf/source/20181218/C313047_B386BE91FC1AD190D494D32FAE513859.pdf, Device=ABM2-16.000MHZ-D4Y-T, Manufacturer Part=ABM2-16.000MHZ-D4Y-T, Normal temperature Frequency Tolerance=±30ppm, Supplier=LCSC, Supplier Footprint=SMD8045-2P, Supplier Part=C313031, Symbol=ABM2-16.000MHZ-D4Y-T
U4: "63dB@(120Hz) 1.5A Fixed 3.3V Positive electrode 20V SOT-223-6 Voltage Regulators - Linear, Low Drop Out (LDO) Regulators ROHS", Dropout Voltage=550mV@(1.5A), JLCPCB Part Class="Extended Part", LCSC Part Name="具有反向电流和反向电压保护功能的 1.5A、20V 超低压降稳压器", Manufacturer=TI(德州仪器), Maximum Input Voltage=20V, Operating Temperature=-40℃~+125℃, Output Current=1.5A, Output Voltage=3.3V, Power Supply Rejection Ratio (PSRR)=63dB@(120Hz), standby current=1mA, Add into BOM=yes, Convert to PCB=yes, Datasheet=https://www.ti.com/cn/lit/gpn/tl1963a, Device=TL1963A-33DCQR, Feature="防静电保护；低ESR；Thermal Protection(TSD)；Overcurrent Protection(OCP)；带使能", Manufacturer Part=TL1963A-33DCQR, Number of Outputs=1, Output Polarity="Positive electrode", Output Type=Fixed, Supplier=LCSC, Supplier Footprint=SOT-223-6, Supplier Part=C2873060, Symbol=TL1963A-33DCQR
U5 U6 U7 U8: "2V~5.5V 1uA 1 7.5ns@5V,50pF AND Gate SOT-23-5 Logic Gates ROHS", JLCPCB Part Class="Extended Part", Manufacturer=TI(德州仪器), Operating Temperature=-55℃~+125℃, Quiescent Current (Max)=1uA, Sink Current=8mA, Source Current=-, Supply Voltage=2V~5.5V, Add into BOM=yes, Convert to PCB=yes, Datasheet=https://www.ti.com/cn/lit/gpn/sn74ahc1g09, Device=SN74AHC1G09DBVR, High Level Range (VIH)=1.5V~3.85V, LCSC Part Name=SN74AHC1G09DBVR, Logic Gate Type=与门, Low Level Range (VIL)=500mV~1.65V, Manufacturer Part=SN74AHC1G09DBVR, Number of Channels=1, Propagation Delay Time=7.5ns@5V,50pF, Series=74AHCSeries, Supplier=LCSC, Supplier Footprint=SOT-23-5, Supplier Part=C840099, Symbol=SN74AHC1G09DBVR
USB1: "USB 2.0 1 Horizontal attachment 5P Female -30℃~+85℃ Micro-B SMD USB Connectors ROHS", Current Rating - Power (Max)=-, JLCPCB Part Class="Extended Part", LCSC Part Name="Micro-B 母 卧贴", Manufacturer=MOLEX, Manufacturer Part=1050170001, Operating Temperature Range=-30℃~+85℃, Add into BOM=yes, Connector Type=Micro-B, Convert to PCB=yes, Datasheet=https://atta.szlcsc.com/upload/public/pdf/source/20171113/C136000_15105610884381115465.pdf, Device=1050170001, Gender=Female, Mounting Style=卧贴, Number of Contacts=5P, Number of Ports=1, Standard="USB 2.0", Supplier=LCSC, Supplier Footprint=SMD, Supplier Part=C136000, Symbol=105017-0001

## Via types
v1: diameter 27.56, hole 11.81, Top Layer to Bottom Layer, tented both sides, 61 vias
v2: diameter 50, hole 28, Top Layer to Bottom Layer, 35 vias

## Nets (pads, with @x,y where several pads share a name; then routed paths per layer and width w, separated by ;. In a path a pad name is that pad's centre, name@x,y a point inside that pad or via, vN(x,y) a via of type N, cw(c..) or ccw(c..) an arc to the next point about the centre after c; other vN are vias at no path point)
16U2_16MHZ_XTAL1: C7.2 R3.2 U2.1 U3.2 | length 450.1
  Top Layer w11.81: U2.1 1114.17,1129.92 1119.4,1124.69 R3.2 1333.73,1124.69 U3.2 1358.27,1037.33 1347.85,1026.91 1347.85,1003.29 1343.12,998.57 C7.2 C7.2@1335.27,1003.3
16U2_16MHZ_XTAL2: C8.2 R3.1 U2.2 U3.1 | length 548.1
  Top Layer w11.81: U2.2@1018.46,1161.42 U2.2 1139.09,1161.42 R3.1 1146.46,1163.5 1146.46,1176.22 1350.39,1380.16 U3.1 1358.27,1441.18 1346.45,1452.99 1346.45,1471.65 1341.73,1476.38 C8.2
16U2_BUF_RESET: ?.2 R10.2 U5.1 U5.2 | length 256.5
  Top Layer w8: R10.2 310.27,1020.98 314.96,1025.66 ?.2 U5.2 U5.1
16U2_HDR_RESET: J2.5 J3.3 | length 462.2
  Top Layer w8: J2.5 403.94,1789.76 J3.3
16U2_MISO: J2.1 U2.17 | length 823.5
  Top Layer w8: J2.1 102.41,1688.23 102.41,1559.8 107.09,1555.12 216.54,1555.12 334.64,1437.01 626.1,1437.01 694.14,1368.97 U2.17
16U2_MOSI: J2.4 U2.16 | length 910.3
  Top Layer w8: J2.4 194.45,1780.28 194.45,1747.18 157.48,1710.21 157.48,1599.17 162.17,1594.49 236.22,1594.49 354.33,1476.38 728.35,1476.38 754.05,1450.68 754.05,1414.52 U2.16
16U2_PB4: J1.3 J3.2 U2.18 | length 2122
  Top Layer w15: U2.18 743.07,1318.9 v2(759.37,1335.2)
  Bottom Layer w15: J3.2 777.19,1938.6 777.19,2039.2 450.57,2039.2 254.57,1843.2 81.37,1843.2 55.37,1817.2 55.37,1539.12 J1.3 157.29,1437.2 657.37,1437.2 v2(759.37,1335.2)
16U2_PB5: J1.1 U2.19 | length 597.3
  Top Layer w8: J1.1 296.85,1397.64 610.24,1397.64 649.79,1358.09 649.79,1310.31 672.7,1287.4 U2.19
16U2_PB6: J1.2 U2.20 | length 553.5
  Top Layer w8: J1.2 236.22,1358.27 591.78,1358.27 633.91,1316.13 633.91,1294.69 672.7,1255.9 U2.20
16U2_PB7: J1.4 U2.21 | length 654
  Top Layer w8: J1.4 175.59,1318.9 578.21,1318.9 672.7,1224.41 U2.21
16U2_Reset: J3.4 R2.2 U2.24 U5.4 | length 1111.3
  Top Layer w8: U5.4 405.51,1248.04 413.39,1240.16 R2.2 477.73,1215.18 570.87,1122.05 660.98,1122.05 668.85,1129.92 U2.24
  Top Layer w15: U2.24 731.37,1129.92 745.37,1143.92 745.37,1219.2 v2(853.37,1327.2)
  Bottom Layer w15: J3.4 728.35,1504.92 853.37,1379.89 v2(853.37,1327.2)
16U2_RX_LED: LED2.2 U2.10 | length 597.2
  Top Layer w15: U2.10 944.88,1603.71 1005.37,1664.2 1297.23,1664.2 LED2.2
16U2_SCLK: J2.3 R7.1 | length 648.1
  Top Layer w8: J2.3 368.64,1530.14 R7.1
16U2_TX_LED: LED1.2 U2.11 | length 718.1
  Top Layer w15: U2.11 913.39,1659.23 963.37,1709.21 1232.76,1709.21 1294.75,1771.2 LED1.2
16U2PROG_328P_RESET: J4.2 R6.2 U2.13 | length 3686.3
  Top Layer w10: R6.2 J4.2
  Top Layer w15: U2.13 850.39,1721.2 893.47,1764.27 v2(1101.44,1764.27) ; R6.2 3066.42,2047.24 3052.37,2033.2 3052.37,1886.2 3132.37,1886.2 v2(3169.37,1849.2)
  Bottom Layer w15: v2(1101.44,1764.27) 1602.37,2265.2 1602.37,2397.2 1619.37,2414.2 2105.37,2414.2 2410.93,2108.64 2492.93,2108.64 2798.94,1802.62 3122.8,1802.62 v2(3169.37,1849.2)
328P_16MHZ_XTAL1: C21.2 R21.2 U1.9 U9.2 | length 376.9
  Top Layer w8: R21.2 R21.2@2053.27,1011.2 ; U1.9 2088.19,975.78 2059.9,1004.06 2059.9,1004.57 R21.2@2053.27,1011.2 ; U9.2 2175.73,1228.58 2074.62,1127.47 C21.2 2074.62,1032.55 R21.2@2053.27,1011.2
328P_16MHZ_XTAL2: C20.2 R21.1 U1.10 U9.1 | length 374.9
  Top Layer w8: U9.1 1895.73,1228.58 1999.43,1124.87 C20.2 1999.43,1029.95 R21.1@2018.18,1011.2 ; U1.10 1988.19,980.7 2011.55,1004.06 2011.55,1004.57 R21.1@2018.18,1011.2 ; R21.1 R21.1@2018.18,1011.2
328P_AUTORESET: C10.1 R13.1 U6.1 | length 1309.3
  Top Layer w8: C10.1 2952.76,2165.35 2933.07,2145.67 2933.07,1815.71 2937.76,1811.02 3070.87,1811.02 3110.24,1771.65 3110.24,1397.64 3155.28,1352.59 R13.1 ; R13.1@3155.6,1231.72 3155.6,1212.67 3167.32,1200.95 3167.32,1151.39 U6.1@3164.46,1148.53 ; U6.1@3161.61,1161.91 U6.1@3161.61,1151.39 ; U6.1 U6.1@3164.46,1148.53 ; U6.1@3161.61,1145.67 U6.1@3161.61,1151.39 ; U6.1@3161.61,1145.67 U6.1@3164.46,1148.53 ; U6.1@3161.61,1145.67 U6.1@3161.61,1151.39 ; U6.1@3161.61,1145.67 U6.1@3164.46,1148.53 ; U6.1@3161.61,1151.39 U6.1@3164.46,1148.53
328P_BUF_RESET: C13.2 R11.2 U6.2 | length 230.6
  Top Layer w8: C13.2 2997.7,1116.84 3014.6,1133.73 3014.6,1156.21 R11.2 3015.25,1156.36 3039.99,1181.1 3110.24,1181.1 U6.2@3129.92,1161.42
  Top Layer w15: U6.2 3129.92,1157.2 U6.2@3129.92,1161.42
328P_RESET: H1.1 J3.1 J6.5 R20.1 U1.1 U6.4 | length 4759.8
  Top Layer w8: J6.5 376.24,1989.76 J3.1 ; U1.1 2966.54,925.2 U6.4@3092.52,1051.18 ; U6.4 U6.4@3092.52,1051.18 ; R20.1 3128.14,984.26 3092.52,1019.88 U6.4@3092.52,1051.18
  Bottom Layer w15: J3.1 679.37,1940.79 679.37,1497.02 799.87,1376.52 799.87,1320.86 1247.18,873.55 1247.18,680.81 H1.1 1818.43,190.25 2133.37,505.2 2133.37,736.2 2188.37,791.2 2754.19,791.2 U1.1
+3V3: C29.2 J5.1 R23.2 U4.4 U4.5 | length 712.7
  Top Layer w8: R23.2 691.12,275.59 684.49,268.96 684.49,268.46 666.14,250.11 ; U4.4 U4.5 848.03,407.67 C29.2 ; 666.14,250.11 666.14,157.48 666.14,250.11
  Top Layer w15: J5.1@666.14,157.48 J5.1 ; R23.2 691.62,305.2 730.62,344.2 825.06,344.2 834.06,353.2 C29.2
+5V: C4.1 C5.2 C15.2 C16.2 C17.2 C18.2 C28.2 D1.2 H1.2 H1.3 H1.4 J5.3 R6.1 R22.1 U2.31 U4.1 U4.2 USB1.1 | length 7865
  Top Layer w8: USB1.1 175.2,746.07 197.8,768.68 197.8,867.09 224.41,893.7 C5.2 297.24,895.67 D1.2 v1(374.01,944.88) ; 698.03,673.66 702.72,678.35 ; 968.02,678.35 972.71,683.03
  Top Layer w15: D1.2 374.01,906.2 563.37,906.2 648.03,821.53 U4.1 U4.2 698.03,636.86 739.37,678.2 843.37,678.2 888.37,633.2 888.37,308.2 855.76,275.59 R22.1 877.04,275.59 885.83,266.8 J5.3 ; U2.31 944.88,984.25 972.44,956.69 C4.1 ; H1.2 1918.43,115.93 1953.43,150.93 C15.2 ; H1.3 2058.43,149.57 C16.2 ; H1.4 2158.43,149.57 C17.2 2188.56,252.01 2246.37,194.2 2347.37,194.2 2363.37,210.2 2363.37,502.2 2433.37,572.2 2433.37,650.2 2467.37,684.2 2512.37,684.2 2733.37,905.2 2733.37,1424.2 2665.37,1492.2 2665.37,1807.2 2739.37,1881.2 v2(2739.37,2047.2) ; v2(3011.37,2104.75) 3011.81,2104.31 R6.1
  Top Layer w30: C28.2 335.94,314.27 v1(335.94,237.05) 335.94,159.83 C18.2 338.29,152.7 352.52,138.46 357.31,138.46 417.03,78.74 868.25,78.74 885.83,96.31 J5.3 1712.6,157.48 1751.97,196.85 1891.88,196.85 1912.11,176.61 1912.11,115.88 H1.2 H1.3 H1.4 ; U4.2 698.03,673.66 ; 702.72,678.35 968.02,678.35 ; 972.71,683.03 C4.1@972.71,924.93
  Bottom Layer w15: v2(2739.37,2047.2) 2796.93,2104.75 v2(3011.37,2104.75)
+5V/3V3: C9.2 C12.2 C19.2 C30.2 D4.1 D5.1 J2.2 J5.2 J6.2 L1.1 L2.1 L3.1 R9.1 R12.2 R13.2 R14.2 R15.1 R18.2 R19.2 R20.2 R22.2 R23.1 U5.5 U6.5 U7.5 U8.5 | length 13900.1
  Top Layer w8: v1(59.06,1220.47) C12.2 D4.1 190.22,1126.2 R9.1@196.85,1119.57 ; J2.2 106.48,1864.35 149.61,1907.48 C9.2 ; R9.1 R9.1@196.85,1119.57 ; v1(196.85,1161.42) R9.1@196.85,1119.57 ; R23.1 v1(767.72,275.59) R22.2 809.73,198.4 785.83,174.49 J5.2 ; v1(2401.57,354.33) L3.1 ; R20.2 R20.2@3163.23,984.26
  Top Layer w15: v1(59.06,1220.47) 55.37,1224.16 55.37,1741.2 J2.2 ; v2(74.37,1088.2) 105.58,1119.4 R9.1 ; J6.2 55.37,2108.42 55.37,1939.45 85.37,1909.45 C9.2 ; v1(196.85,1161.42) 236.22,1200.79 v1(236.22,1240.16) 244.1,1248.04 U5.5 ; v2(809.73,233.2) R22.2 ; U8.5 971.37,1995.27 973.34,1997.24 995.37,1997.24 ; v2(968.37,2029.2) 968.37,2024.24 995.37,1997.24 ; R15.1 1161.42,433.07 ; v2(1206.37,707.2) 1259.84,760.67 L1.1 v1(1356.94,828.1) 1293.92,765.08 v1(1293.92,723.06) ; v2(1208.37,376.24) 1161.42,423.2 1161.42,433.07 ; R14.2 v1(1293.92,723.06) ; R19.2 1443.37,1988.19 1443.37,1999.2 1411.37,2031.2 1027.37,2031.2 1015.75,2019.57 C19.2 995.37,1997.24 ; L2.1 2300.83,1221.47 v1(2300.83,1290.22) 2216.37,1374.68 2216.37,1883.27 v2(2535.3,2202.2) ; L3.1 2438.37,422.07 v2(2438.37,355.2) 2763.37,355.2 3228.35,820.17 v1(3228.35,984.25) v1@3222.55,984.25 ; v1(2705.77,1751.97) 2706.63,1752.83 R18.2 ; v1(3051.18,1318.9) R12.2 3010.51,1317.55 3010.51,1235.93 D5.1 ; v1(3054.55,1273.07) 3026.57,1245.09 3026.57,1244.38 3016.78,1234.59 D5.1 ; v1(3110.24,1279.53) 3110.24,1243.41 3117.56,1236.08 3117.56,1235.58 R13.2@3119.62,1233.52 ; R13.2 3120.69,1232.45 R13.2@3119.62,1233.52 ; R20.2@3163.23,984.26 R20.2@3168.57,984.26 ; U6.5 U6.5@3169.18,1060.91 ; v1@3222.54,984.26 R20.2@3168.57,984.26 ; v1(3228.35,1062.99) 3226.38,1061.02 3169.29,1061.02 U6.5@3169.18,1060.91 ; 1161.42,433.07 v1(1181.1,413.39) 1317.31,413.39 1325.74,421.82 1325.74,492.25 1315.37,502.62 1297.95,502.62 1279.37,521.2 1279.37,588.27 1299.37,608.27 U7.5 1324.81,610.24 v1(1377.95,610.24) 1377.95,639.03 v1(1293.92,723.06) ; D5.1 3012.93,1233.52 R13.2@3119.62,1233.52 ; R20.2@3168.57,984.26 R20.2@3169.18,984.87 ; R20.2@3169.18,984.87 U6.5@3169.18,1059.05 ; R20.2@3169.18,984.87 U6.5@3169.18,1059.05 ; U6.5@3169.18,1059.05 U6.5@3169.18,1060.91 ; U6.5@3169.18,1059.05 U6.5@3169.18,1060.91
  Top Layer w20: J6.2 106.48,2173.29 129.92,2196.73 C30.2
  Bottom Layer w15: v2(74.37,1088.2) 74.37,953.2 271.86,755.71 271.86,697.2 304.35,664.71 1163.88,664.71 v2(1206.37,707.2) ; J6.2 229.52,2282.57 715,2282.57 v2(968.37,2029.2) ; v2(809.73,233.2) 952.78,376.24 v2(1208.37,376.24) ; v1(1181.1,413.39) 1536.29,58.2 1871.37,58.2 1871.37,177.2 2025.37,331.2 2414.37,331.2 v2(2438.37,355.2) 2402.44,355.2 v1(2401.57,354.33) ; v2(2535.3,2202.2) 2535.3,2129.27 2771.37,1893.2 3187.37,1893.2 3210.37,1870.2 3210.37,1428.89 v1(3054.55,1273.07) ; v1(2705.77,1751.97) 3051.18,1406.55 v1(3051.18,1318.9) ; v1(3110.24,1279.53) 3228.35,1161.42 v1(3228.35,1062.99)
+AREF: C26.2 C27.2 H4.8 U1.21 | length 3140.8
  Top Layer w8: C26.2 2188.19,514.96 U1.21
  Top Layer w20: H4.8 1851.93,2257.57 1830.73,2236.36 C27.2 v1(1893.46,2234.39)
  Bottom Layer w20: v1(1893.46,2234.39) 2972.44,1155.42 2972.44,759.75 2960.73,748.03 2204.72,748.03 2188.19,731.49 U1.21
GND: ?.1 C1.2 C2.1 C3.1 C4.2 C5.1 C6.1 C7.1 C8.1 C9.1 C12.1 C13.1 C14.1 C15.1 C16.1 C17.1 C18.1 C19.1 C20.1 C21.1 C22.2 C23.2 C24.1 C25.1 C26.1 C27.1 C28.1 C29.1 C30.1 D1.1 D2.1 D3.1 H1.5 H1.6 H4.7 J2.6 J6.6 LED3.2 R1.2 R2.1 R4.2 R5.2 R8.1 SW1.3 SW1.4 SW2.3 SW2.4 U1.8 U1.22 U2.3 U2.28 U4.3 U4.6 U5.3 U6.3 U7.3 U8.3 USB1.5 USB1.6 USB1.7 USB1.8 USB1.9 USB1.10 | length 25375.5
  Top Layer w8: C12.1 177.17,1224.41 v1(177.17,1279.53) ; U2.3 1084.65,1192.91 1188.98,1297.24 C3.1 C2.1 ; v1(3051.18,1122.05) 3051.18,1137.05 3055.87,1141.73 3088.58,1141.73 U6.3
  Top Layer w10: R1.2 289.37,590.55 295.27,596.46 D3.1 v1(295.28,551.18) ; D2.1 285.44,777.56 295.28,787.4 C5.1 297.24,836.62 D1.1 v1(374.02,787.4) ; C15.1@1945.59,314.96 1950.06,310.49 v1(1950.06,365.22) ; v1(2058.27,360.52) 2058.43,360.36 C16.1 ; v1(2086.61,393.7) C25.1 ; C17.1 v1(2158.43,361.26) ; v1(2185.04,393.7) C26.1 ; C24.1 v1(2511.34,244.57) ; v1(2933.07,1023.62) 2994.34,1023.62 C13.1 ; C25.1@2084.65,456.69 C25.1@2085.63,457.67 ; C25.1@2084.65,456.69 C25.1@2085.63,457.67 ; C25.1@2084.65,456.69 C25.1 ; C25.1@2085.63,457.67 C25.1@2086.61,458.66 ; C25.1@2085.63,457.67 C25.1@2086.61,458.66 ; C25.1 C25.1@2086.61,458.66
  Top Layer w15: USB1.8 51.98,604.2 54.73,606.94 USB1.10@54.73,655.52 ; USB1.9 51.98,783.95 54.73,781.2 USB1.10@54.73,734.26 ; v1(157.48,433.07) 208.18,382.37 C28.1 ; v2(177.37,1995.2) 204.73,1967.84 C9.1 285.37,1909.45 355.62,1839.2 ; C30.1 255.91,2283.46 297.17,2242.2 v2(414.37,2242.2) ; D2.1 236.22,793.2 280.22,837.2 295.28,837.2 330.37,837.2 v1@374.01,793.55 ; J2.6 353.37,1839.2 355.62,1839.2 ; D1.1 v1@374.01,793.55 ; v2(374.37,614.2) v2@374.37,629.57 ; v1(413.39,1141.73) R2.1@413.39,1180.6 ; R2.1 R2.1@413.39,1180.6 ; v1(629.92,413.39) 633.32,413.39 653,393.7 C29.1 708.66,398.48 748.03,437.85 ; v1(728.35,452.76) 728.35,433.07 684.19,388.92 v1(649.61,354.33) v2@374.37,629.57 ; C6.1 826.77,981.97 850.39,1005.6 U2.28 850.39,1246.22 v2(916.37,1312.2) ; C6.1@843.78,925.2 C4.2 v2(917.32,826.77) ; v2(844.37,868.2) 844.37,825.2 820.26,801.09 v1(748.03,801.09) 686.37,801.09 686.37,953.2 576.57,1062.99 v1(433.07,1062.99) ?.1 370.08,1135.82 352.36,1153.54 U5.3 394.21,1161.42 R2.1@413.39,1180.6 ; v2(1036.37,535.2) 1036.37,665.2 1079.83,708.66 v1@1080.37,708.66 ; v1(1062.99,826.77) v2@1080.37,809.39 ; C19.1 1054.87,1961.2 909.37,1961.2 868.37,1920.47 ; v2(1072.37,826.77) v2@1083.94,826.77 ; v2@1084.65,1192.91 1093.09,1192.91 v2(1100.37,1200.2) ; SW2.3 SW2.4 1608.07,68.9 v2(1643.37,104.2) ; C14.1 v1(1082.68,708.66) ; v1(1189.79,1459.55) 1189.92,1459.55 v1@1189.92,1451.71 ; U7.3 1256.37,533.47 1256.37,491.2 v2(1285.37,462.2) ; C8.1 v1(1437.01,1476.38) 1511.18,1476.38 1563.99,1529.2 R4.2 1563.99,1753.2 1563.41,1753.78 R5.2 1611.11,1816.15 1649.43,1777.82 1730.74,1777.82 1775.61,1822.69 1775.61,2090.2 ; C7.1 1411.37,998.57 1431.35,978.59 ; v1(1451.32,998.57) 1431.35,978.59 ; H4.7 1751.93,2260.04 1775.61,2236.36 C27.1 1775.61,2090.2 ; v1(1909.45,1082.68) 1933.09,1059.03 ; C15.1@1945.59,314.96 1953.43,314.96 C15.1 ; v1(1948.82,1043.31) v1@1942.37,1036.86 ; v1(1950.06,365.22) 2010.6,304.69 C16.1 ; C20.1 1951.59,1081.04 1950.37,1081.04 1933.09,1063.76 1933.09,1059.03 ; v1(2058.27,360.52) 2058.27,365.36 v1(2086.61,393.7) ; C25.1@2084.65,456.69 1954.88,456.69 1906.37,505.2 1906.37,564.92 ; C25.1 C26.1 2222.86,456.69 2288.19,522.01 U1.22 ; C21.1 2133.37,1081.04 v1@2183.4,1031.01 ; v2(2180.43,396.2) 2158.43,374.2 v1(2158.43,361.26) 2185.04,387.87 v1(2185.04,393.7) ; v1(2183.4,1081.04) v1@2183.4,1031.01 ; v1(2185.04,1023.62) 2183.4,1025.26 v1@2183.4,1031.01 ; U1.8 U1.8@2188.19,930.01 ; C23.2 2255.9,997.73 U1.8@2194.37,936.2 ; C22.2 2418.37,1157.29 2476.37,1099.29 2476.37,1004.2 2442.37,970.2 2442.37,905.2 2467.37,880.2 2614.37,880.2 2639.37,905.2 v2(2639.37,1065.2) ; v1(2421.26,137.79) 2421.26,154.49 v1(2511.34,244.57) ; v1(2490.86,1155.59) 2465.25,1181.2 2254.37,1181.2 2234.37,1161.2 2234.37,999.2 2194.37,959.2 ; v1(2607.34,1929.13) LED3.2 ; v2(2865.37,1065.2) 2883.37,1047.2 3020.37,1047.2 3051.18,1078.01 ; C13.1@2994.34,1023.62 3011.37,1023.62 3051.18,1063.43 3051.18,1078.01 ; R8.1 3011.81,1881.2 3061.81,1831.2 3107.37,1831.2 3149.61,1788.96 3149.61,1720.57 v1(3149.61,1673.23) ; v1(3051.18,1122.05) 3051.18,1078.01 ; U6.3 3092.52,1119.35 ; v1(3149.61,1496.06) 3151.05,1494.62 3195.37,1450.3 3195.37,1111.2 3187.37,1103.2 3102.52,1103.2 3092.52,1113.2 3092.52,1119.35 ; 355.62,1839.2 759.37,1839.2 801.37,1881.2 801.37,1902.47 819.37,1920.47 U8.3 868.37,1920.47 ; v1@374.01,793.55 v1(374.02,787.4) v2(374.01,707.2) 374.01,629.92 v2@374.37,629.57 ; v1@374.01,793.55 374.37,793.2 v2@374.37,629.57 ; 748.03,437.85 748.03,452.76 ; 748.03,437.85 748.03,452.76 ; 748.03,452.76 U4.3 748.03,452.76 ; 868.37,1920.47 967.65,1821.2 1206.37,1821.2 1290.37,1905.2 1590.61,1905.2 1775.61,2090.2 ; v1@1080.37,708.66 1080.37,204.2 1545.65,204.2 1906.37,564.92 ; v1@1080.37,708.66 v2@1080.37,809.39 ; v1@1080.37,708.66 v1(1082.68,708.66) ; v2@1080.37,809.39 1080.37,823.2 v2@1083.94,826.77 ; v2@1080.37,809.39 1082.68,807.08 v1(1082.68,708.66) ; v2@1083.94,826.77 C1.2 1141.73,857.2 1150.73,866.2 ; v2@1083.94,826.77 1123.37,866.2 1150.73,866.2 ; 1150.73,866.2 1318.95,866.2 ; 1318.95,866.2 1411.37,866.2 1451.37,906.2 1451.37,958.57 1431.35,978.59 ; 1318.95,866.2 1431.35,978.59 ; 1906.37,564.92 1933.09,591.64 1933.09,674.92 ; 1933.09,674.92 1933.09,1059.03 ; 1933.09,674.92 2138.37,880.2 ; 1933.09,1059.03 1942.37,1049.75 v1@1942.37,1036.86 ; v1@1942.37,1036.86 1942.37,905.2 1967.37,880.2 2115.37,880.2 ; 2115.37,880.2 2138.37,880.2 ; 2115.37,880.2 2194.37,959.2 ; 2138.37,880.2 2153.37,880.2 2194.37,921.2 U1.8@2194.37,936.2 ; 2138.37,880.2 U1.8@2188.19,930.01 ; v1@2183.4,1031.01 2194.37,1020.04 2194.37,959.2 ; U1.8@2188.19,930.01 U1.8@2194.37,936.2 ; U1.8@2194.37,936.2 2194.37,959.2 ; 3051.18,1078.01 3092.52,1119.35 ; USB1.7@157.88,596.86 157.88,643.69 USB1.7@157.88,596.86
  Top Layer w20: v1(157.48,433.07) 158.27,433.86 236.22,511.81 R1.2 ; v1(748.03,801.09) 858.1,801.09 864.1,807.09 v1(866.14,807.09) 900.99,841.94 900.99,865.09 v1(902.44,866.54) 900.99,867.98 885.17,867.98 C6.1@843.78,909.37 ; C6.1 C6.1@843.78,925.2 ; v1(1062.99,826.77) C1.2 ; v1(1082.68,708.66) C14.1 ; SW2.3 SW2.4 ; C2.1 1189.92,1378.89 v1@1189.92,1451.71 ; v1(1236.22,476.38) U7.3 ; C8.1 v1(1437.01,1476.38) ; C7.1 v1(1451.32,998.57) ; v1(1909.45,1082.68) 1910.46,1081.67 1955.88,1081.67 C20.1 1951.59,1081.04 1950.96,1080.41 1950.96,1047.49 1948.82,1045.35 v1(1948.82,1043.31) ; C21.1 v1(2183.4,1081.04) ; v1(2185.04,1023.62) C23.2 ; C22.2 2417.98,1156.44 2490.01,1156.44 v1(2490.86,1155.59) ; v1(3011.81,1850.39) R8.1 ; v1(3149.61,1496.06) 3151.05,1494.62 3151.05,1468.6 3165.94,1453.71 3166.37,1453.71 3198.82,1421.26 SW1.3 ; v1(3149.61,1574.8) 3198.82,1574.8 ; v1(3149.61,1673.23) 3149.61,1720.57 3161.32,1732.28 3190.95,1732.28 SW1.4 ; C6.1@843.78,909.37 C6.1@843.78,925.2 ; C6.1@843.78,909.37 C6.1@843.78,925.2
  Top Layer w30: USB1.10@54.73,655.52 v1(54.73,694.89) USB1.10@54.73,734.26 ; USB1.7@157.88,596.86 USB1.7 v1@158.27,433.86 ; C18.1 210.54,159.83 v1(210.54,237.05) 210.54,314.27 C28.1@209.85,314.96 ; SW1.3@3198.82,1421.26 3198.82,1574.8 SW1.4 ; 158.27,333.85 v1@158.27,433.07 ; 158.27,333.85 v1@158.27,433.07 ; 158.27,333.85 177.17,314.96 ; v1@158.27,433.07 v1@158.27,433.86 ; v1@158.27,433.07 v1@158.27,433.86 ; 177.17,314.96 C28.1@208.18,314.96 ; 177.17,314.96 C28.1@208.18,314.96 ; C28.1@208.18,314.96 C28.1@209.85,314.96 ; C28.1@208.18,314.96 C28.1@209.85,314.96